# EAGLE board Soccer_Robot V4 (EAGLE 9.5.1)
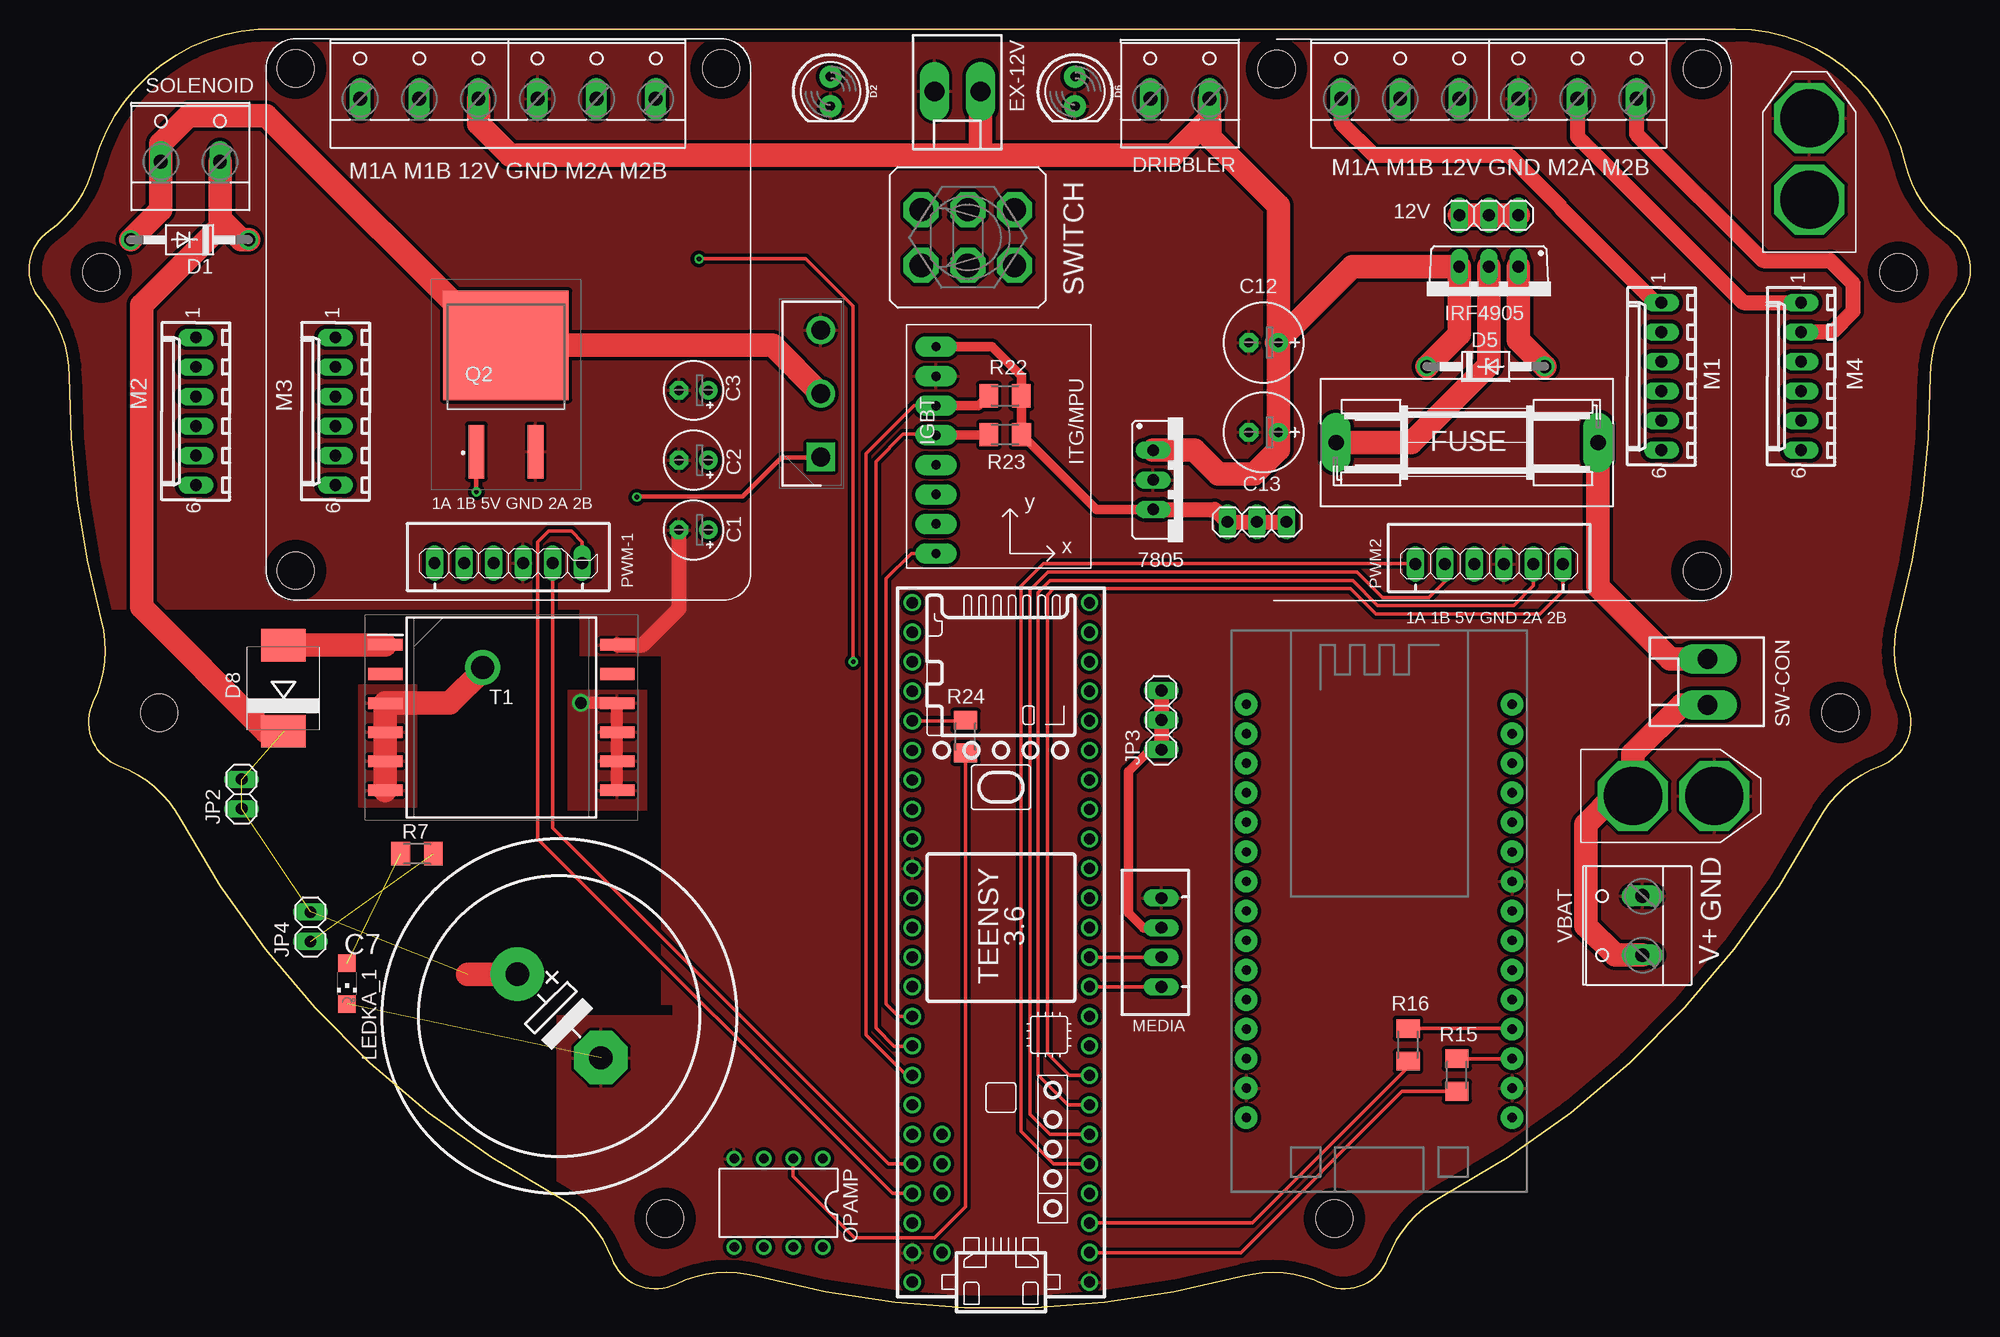
[diagram p0: board, top side]
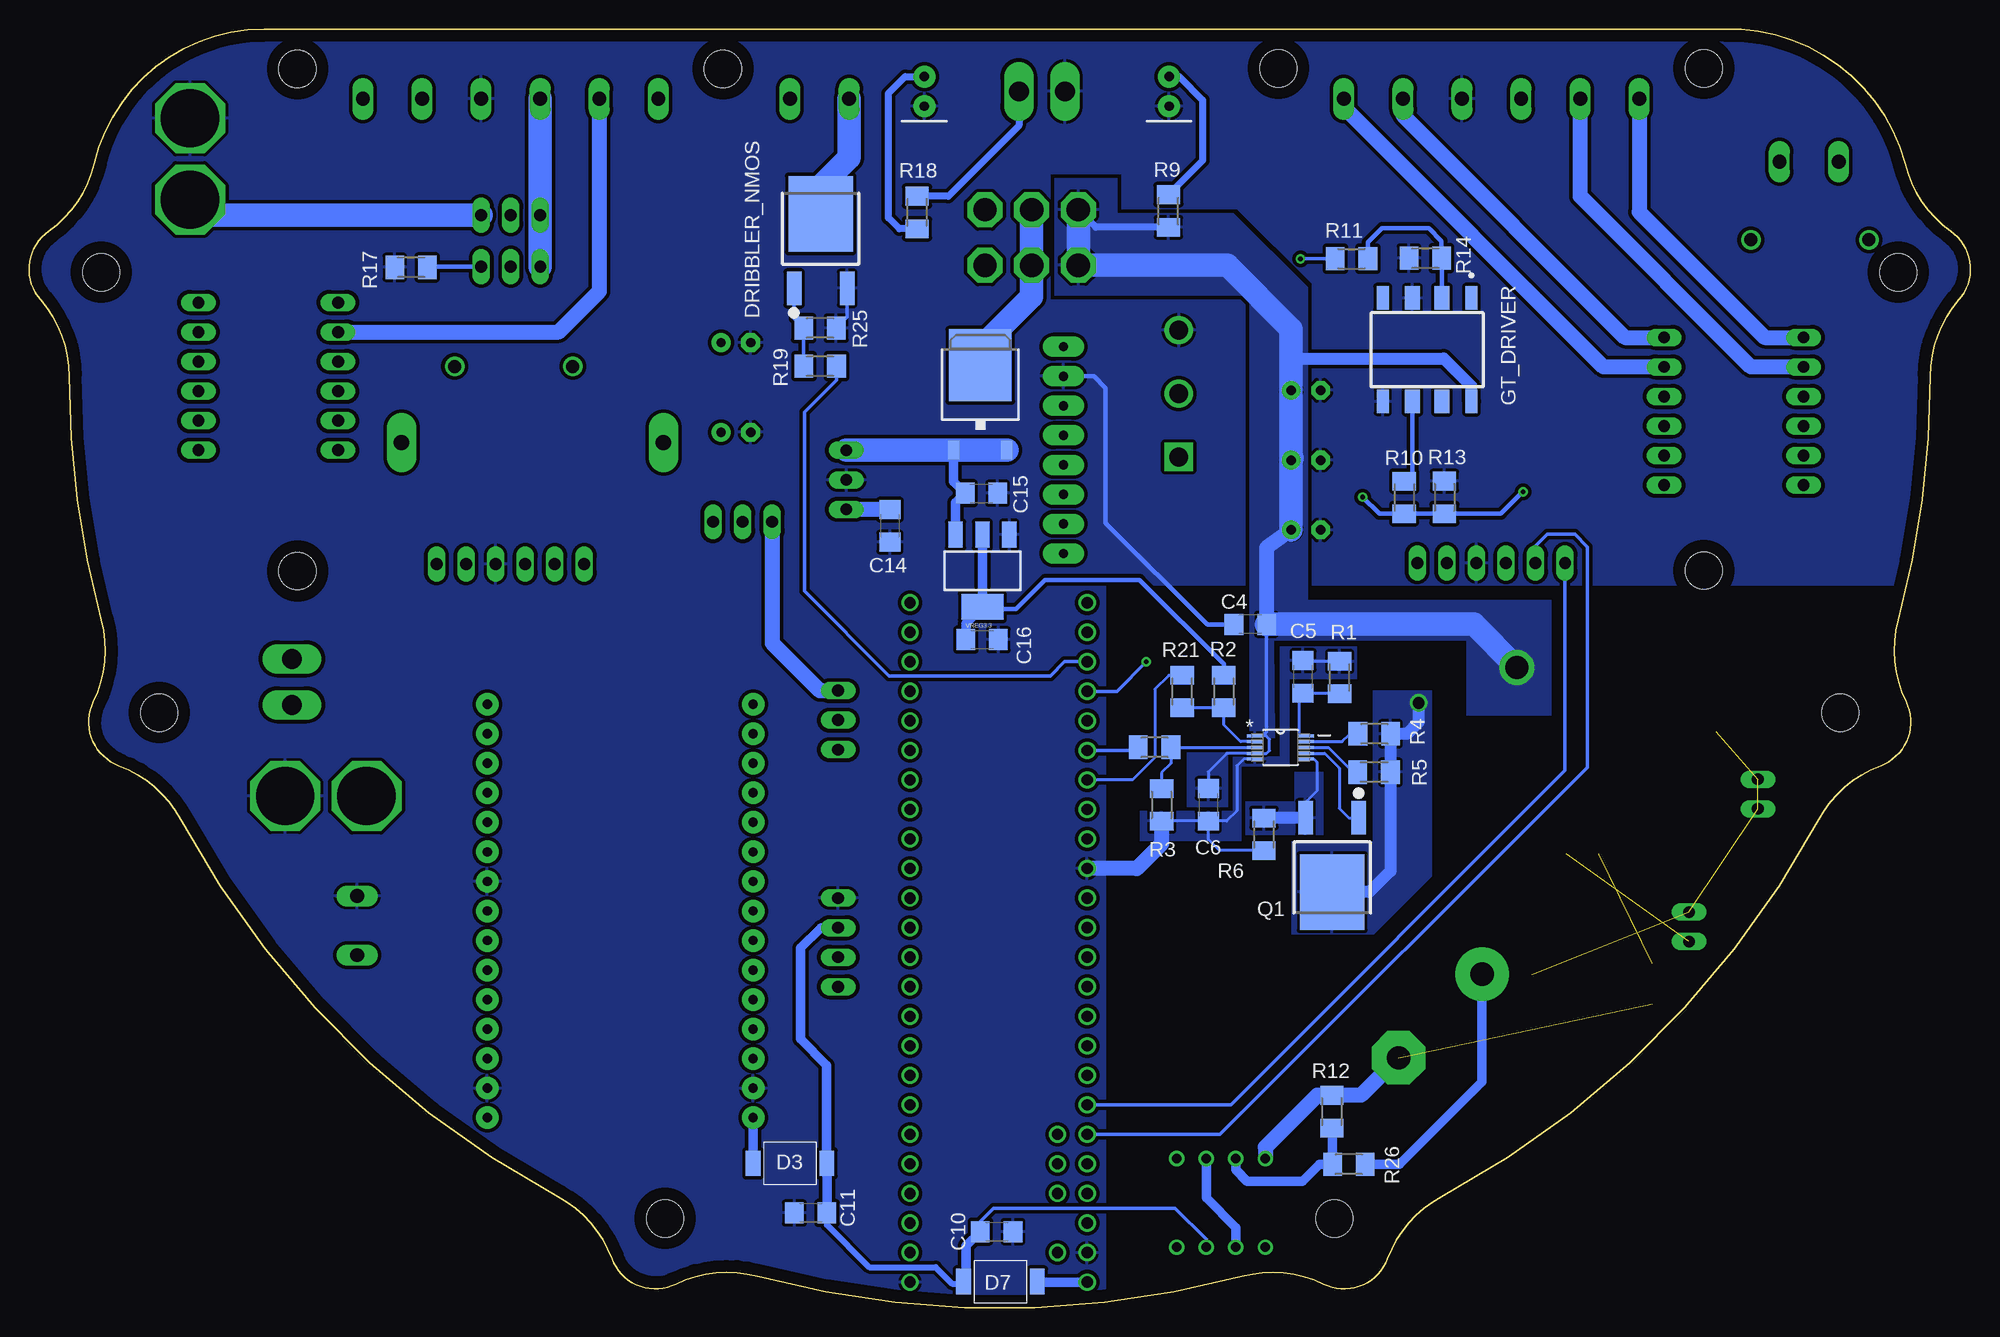
[diagram p1: board, bottom side, seen from below]

Size 166.9 x 109.94 mm. Coordinates in mm from the lower left corner, seen from the top.
Outline: 21.21,109.94 146.7,109.94 arc-77 161.29,98.39 arc41 165.22,92.55 arc-96 165.92,86.66 arc41 163.45,80.07 arc-15 160.69,59.12 arc41 161.37,52.11 arc-96 159.17,46.6 arc41 153.87,41.98 arc-33 121.41,9.53 arc41 116.79,4.22 arc-96 111.28,2.03 arc41 104.28,2.7 arc-30 62.62,2.7 arc41 55.62,2.03 arc-96 50.11,4.22 arc41 45.49,9.53 arc-33 13.03,41.98 arc41 7.73,46.6 arc-96 5.53,52.11 arc41 6.21,59.12 arc-15 3.45,80.07 arc41 0.98,86.66 arc-96 1.68,92.55 arc41 5.61,98.39 arc-77 21.21,109.94
Copper layers (1*16): Top 0.035mm / dielectric 1.5mm / Bottom 0.035mm
Design rules "default": minimum track width 6mil, minimum drill 0.35mm, track to track 6mil, track to pad 6mil, pad to pad 6mil, via to via 6mil, smd to smd 6mil, copper to edge 40mil, drill to drill 6mil, minimum pad ring 10mil, minimum via ring 8mil, stop-mask expansion 4mil, vias tented up to drill 0mil, thermal gap 10mil
Holes 3.2 mm at 143.82,106.52 107.25,106.52 22.92,106.57 54.68,7.68 11.19,51.17 22.92,63.39 6.21,89.03 112.22,7.68 143.82,63.34 155.71,51.17 160.69,89.03 59.49,106.57

## Footprints (pad centres in the part's own frame; a part is rotated, then mirrored left to right if it is on the bottom)
1X03 = drill 1.016 long: 1 -2.54,0; 2 0,0; 3 2.54,0
78XXS = drill 1.016 long: GND 0,-2.54; IN -2.54,-2.54; OUT 2.54,-2.54
E2,5-5 = drill 0.813 pad 1.6: + -1.27,0 | drill 0.813 pad 1.6 octagon: - 1.27,0
C1206 = smd 1.6 x 1.8: 1 -1.4,0; 2 1.4,0
EB30D = drill 2.007 pad 4.597: + -5.08,0 | drill 2.007 pad 4.597 octagon: - 5.08,0
E2,5-7 = drill 0.813 pad 1.6: + -1.27,0 | drill 0.813 pad 1.6 octagon: - 1.27,0
DO41-10 = drill 1.118: A 5.08,0; C -5.08,0
LED_5MM = drill 0.813 pad 1.88: A -1.27,0; K 1.27,0
SMBG = smd 1.27 x 2.16: A 3.17,0; C -3.17,0
DO41Z10 = drill 1.118: A 5.08,0; C -5.08,0
SMC = smd 2.8 x 3.8: A 3.7,0; C -3.7,0
W237-132 = drill 1.194 long: 1 -2.54,-0.635; 2 2.54,-0.635
DPAK3-CASE-369AS = smd 1.25 x 2.85: 1 -2.28,-6.4; 2 2.28,-6.4 | smd 5.55 x 6.5: 3 0,0
KK-156-2 = drill 1.7 pad 2.184 long: 1 -1.98,0; 2 1.98,0
SH22,5A = drill 1.321 pad 2.54 long: 1 -11.252,0; 2 11.252,0
HCPL-3120-GULL-WING = smd 1.016 x 2: 1 -3.81,-4.45; 4 3.81,-4.45; 5 3.81,4.45; 8 -3.81,4.45 | smd 1.27 x 2: 2 -1.27,-4.45; 3 1.27,-4.45; 6 1.27,4.45; 7 -1.27,4.45
TO252 = smd 1 x 1.6: 1 -2.28,-6.07; 2 2.28,-6.07 | smd 5.4 x 6.2: 3 0,1.23
TO545P500X1560X2420-3P = drill 1.62 pad 2.43 square: 1 0,0 | drill 1.62 pad 2.43: 2 5.45,0; 3 10.9,0
TO220BV = drill 1.016 long: D 0,-2.54; G -2.54,-2.54; S 2.54,-2.54
1X02 = drill 1.016 long: 1 -1.27,0; 2 1.27,0
CHIPLED_1206 = smd 1.5 x 1.5: A 0,-1.75; C 0,1.75
6410-06 = drill 1.016 long: 1 6.35,0; 2 3.81,0; 3 1.27,0; 4 -1.27,0; 5 -3.81,0; 6 -6.35,0
JST-XH-04-PACKAGE-LONG-PAD = drill 1.016 long: 1 -3.81,0; 2 -1.27,0; 3 1.27,0; 4 3.81,0
DIL08 = drill 0.813 pad 1.27: 1 -3.81,-3.81; 2 -1.27,-3.81; 3 1.27,-3.81; 4 3.81,-3.81; 5 3.81,3.81; 6 1.27,3.81; 7 -1.27,3.81; 8 -3.81,3.81
JST-XH-06-PACKAGE-LONG-PAD = drill 1.016 long: 1 -6.35,0; 2 -3.81,0; 3 -1.27,0; 4 1.27,0; 5 3.81,0; 6 6.35,0
IDB30E60 = smd 4.6 x 1.35: 1 6.315,-2.55; 3 6.315,2.55 | smd 9.4 x 10.8: 2 -2.835,0
M1206 = smd 1.6 x 2: 1 -1.4,0; 2 1.4,0
320-938 = drill 2.007 octagon: 1 -2.388,4.013; 2 -2.388,0; 3 -2.388,-4.013; 4 2.388,4.013; 5 2.388,0; 6 2.388,-4.013
SOP250P2197X889-12N = smd 2.95 x 1: 1 -9.975,6.25; 2 -9.975,3.75; 3 -9.975,1.25; 4 -9.975,-1.25; 5 -9.975,-3.75; 6 -9.975,-6.25; 7 9.975,-6.25; 8 9.975,-3.75; 9 9.975,-1.25; 10 9.975,1.25; 11 9.975,3.75; 12 9.975,6.25
SOP50P490X110-10N = smd 1.397 x 0.279: 1 -2.184,0.991; 2 -2.184,0.508; 3 -2.184,0; 4 -2.184,-0.508; 5 -2.184,-0.991; 6 2.184,-0.991; 7 2.184,-0.508; 8 2.184,0; 9 2.184,0.508; 10 2.184,0.991
GY-521 = drill 0.8 pad 1.778 long: ADO -8.89,-6.35; GND -8.89,6.35; INT -8.89,-8.89; SCL -8.89,3.81; SDA -8.89,1.27; VCC -8.89,8.89; XCL -8.89,-3.81; XDA -8.89,-1.27
XT60 = drill 5 octagon: + 4.5,0; - 11.5,0
ESP12E_DEVKIT = drill 0.8 pad 1.93: 3V3@0 -11.43,-7.62; 3V3@1 11.43,5.08; 3V3@2 11.43,-17.78; AD0 -11.43,17.78; CLK -11.43,-2.54; CMD -11.43,2.54; D0 11.43,17.78; D1 11.43,15.24; D2 11.43,12.7; D3 11.43,10.16; D4 11.43,7.62; D5 11.43,0; D6 11.43,-2.54; D7 11.43,-5.08; D8 11.43,-7.62; EN -11.43,-10.16; GND@0 -11.43,-5.08; GND@1 -11.43,-15.24; GND@2 11.43,2.54; GND@3 11.43,-15.24; RST -11.43,-12.7; RSV@0 -11.43,15.24; RSV@1 -11.43,12.7; RX 11.43,-10.16; SD0 -11.43,0; SD1 -11.43,5.08; SD2 -11.43,7.62; SD3 -11.43,10.16; TX 11.43,-12.7; VIN -11.43,-17.78
TEENSY_3.5/3.6_BASIC = drill 0.965: 0/RX -25.4,-7.62; 1/TX -22.86,-7.62; 2 -20.32,-7.62; 3/CANTX -17.78,-7.62; 3V3 7.62,-7.62; 3V3_LO -22.86,7.62; 4/CANRX -15.24,-7.62; 5 -12.7,-7.62; 6 -10.16,-7.62; 7 -7.62,-7.62; 8 -5.08,-7.62; 9/CS -2.54,-7.62; 10/CS 0,-7.62; 11/MOSI 2.54,-7.62; 12/MISO 5.08,-7.62; 13/SCK 5.08,7.62; 14/A0 2.54,7.62; 15/A1 0,7.62; 16/A2 -2.54,7.62; 17/A3 -5.08,7.62; 18/A4/SDA -7.62,7.62; 19/A5/SCL -10.16,7.62; 20/A6 -12.7,7.62; 21/A7 -15.24,7.62; 21/DAC0 12.7,7.62; 22/A8 -17.78,7.62; 23/A9 -20.32,7.62; 24 10.16,-7.62; 25 12.7,-7.62; 26 15.24,-7.62; 27 17.78,-7.62; 28 20.32,-7.62; 29 22.86,-7.62; 30 25.4,-7.62; 31/A12 27.94,-7.62; 32/A13 30.48,-7.62; 33/A14 30.48,7.62; 34/A15 27.94,7.62; 35/A16 25.4,7.62; 36/A17 22.86,7.62; 37/A18 20.32,7.62; 38/A19 17.78,7.62; 39/A20 15.24,7.62; A10 -17.78,5.08; A11 -15.24,5.08; A22/DAC1 10.16,7.62; AGND -25.4,7.62; AREF -20.32,5.08; GND -27.94,-7.62; GND2 7.62,7.62; VIN -27.94,7.62; VUSB -25.4,5.08
SOT223 = smd 1.219 x 2.235: 1 -2.311,-3.099; 2 0,-3.099; 3 2.311,-3.099 | smd 3.6 x 2.2: 4 0,3.099
W237-6P = drill 1.194 long: 1 -12.7,-0.635; 2 -7.62,-0.635; 3 -2.54,-0.635; 4 2.54,-0.635; 5 7.62,-0.635; 6 12.7,-0.635

## Placement (x,y rotation side)
12V  [1X03]  125.49,93.94 0 top
7805  [78XXS]  99.18,71.18 270 top
C1  56uF  [E2,5-5]  57.14,66.88 180 top
C2  56uF  [E2,5-5]  57.14,72.88 180 top
C3  56uF  [E2,5-5]  57.14,78.88 180 top
C4  10uF  [C1206]  61.91,58.75 180 bottom
C5  100pF  [C1206]  57.37,54.25 90 bottom
C6  10uF  [C1206]  65.52,43.25 270 bottom
C7  [EB30D]  45.58,25.08 315 top
C10  10uF  [C1206]  83.72,6.55 0 bottom
C11  10uF  [C1206]  99.71,8.15 180 bottom
C12  [E2,5-7]  106.14,82.98 180 top
C13  47uF  [E2,5-7]  106.14,75.28 180 top
C14  10uF  [C1206]  92.9,67.23 270 bottom
C15  10uF  [C1206]  85.03,70.03 0 bottom
C16  10uF  [C1206]  84.97,57.45 0 bottom
D1  1N4004  [DO41-10]  13.8,91.82 180 top
D2  IN_LED  [LED_5MM]  68.9,104.58 270 top
D3  [SMBG]  101.49,12.41 0 bottom
D5  [DO41Z10]  125.23,80.93 0 top
D6  [LED_5MM]  89.93,104.58 270 top
D7  [SMBG]  83.39,2.25 180 bottom
D8  [SMC]  21.87,53.25 90 top
DRIBBLER  [W237-132]  98.94,104.58 0 top
DRIBBLER_NMOS  FDD86369-F085  [DPAK3-CASE-369AS]  98.85,94.05 0 bottom
EX-12V  [KK-156-2]  79.82,104.58 180 top
FUSE  [SH22,5A]  123.62,74.39 180 top
GT_DRIVER  HCPL-3120-300E  [HCPL-3120-GULL-WING]  46.71,82.37 180 bottom
IC2  DIODE  [TO252]  85.12,79.81 0 bottom
IGBT  FGA25N120ANTDTU  [TO545P500X1560X2420-3P]  68.06,73.15 90 top
IRF4905  IRF9530  [TO220BV]  125.49,86.97 180 top
JP1  +5V  [1X03]  105.56,67.57 0 top
JP2  [1X02]  18.27,44.17 90 top
JP3  +5V  [1X03]  97.34,50.53 90 top
JP4  [1X02]  24.19,32.75 90 top
LEDKA_1  [CHIPLED_1206]  27.33,27.87 180 top
M1  22-27-2061-06  [6410-06]  140.34,80.08 90 top
M2  22-27-2061-06  [6410-06]  14.34,77.08 90 top
M3  22-27-2061-06  [6410-06]  26.34,77.08 90 top
M4  22-27-2061-06  [6410-06]  152.34,80.08 90 top
MEDIA  [JST-XH-04-PACKAGE-LONG-PAD]  97.34,31.41 90 top
OPAMP  MCP601P  [DIL08]  64.42,9.01 180 top
PWM2  JST-XH-06-PIN-LONG-PAD  [JST-XH-06-PACKAGE-LONG-PAD]  125.52,63.95 0 top
PWM-1  JST-XH-06-PIN-LONG-PAD  [JST-XH-06-PACKAGE-LONG-PAD]  41.2,64.03 0 top
Q1  FDD86369-F085  [DPAK3-CASE-369AS]  54.87,35.73 180 bottom
Q2  IGB20N60H3  [IDB30E60]  41,79.91 270 top
R1  2.49K  [M1206]  54.23,54.18 270 bottom
R2  10K  [M1206]  64.19,52.98 90 bottom
R3  10K  [M1206]  69.53,43.24 90 bottom
R4  60.4K  [M1206]  51.26,49.35 0 bottom
R5  43K  [M1206]  51.26,46.05 0 bottom
R6  8m  [M1206]  60.75,40.7 90 bottom
R7  47K  [M1206]  33.35,39.03 0 top
R9  1K  [M1206]  68.96,94.3 270 bottom
R10  100E  [M1206]  48.68,69.67 90 bottom
R11  100E  [M1206]  53.2,90.19 180 bottom
R12  1.5k  [M1206]  54.88,16.86 270 bottom
R13  10k  [M1206]  45.22,69.68 90 bottom
R14  10k  [M1206]  46.87,90.25 180 bottom
R15  100E  [M1206]  122.75,20.01 270 top
R16  100E  [M1206]  118.55,22.6 270 top
R17  100K  [M1206]  134.07,89.45 0 bottom
R18  1K  [M1206]  90.57,94.17 90 bottom
R19  100E  [M1206]  98.89,80.96 0 bottom
R20  100E  [M1206]  70.13,48.19 0 bottom
R21  100E  [M1206]  67.76,52.98 270 bottom
R22  4.7K  [M1206]  83.9,78.41 180 top
R23  4.7k  [M1206]  83.92,75.08 180 top
R24  100E  [M1206]  80.5,49.11 270 top
R25  10K  [M1206]  98.9,84.23 0 bottom
R26  100k  [M1206]  53.44,12.34 0 bottom
SOLENOID  [W237-132]  13.87,99.18 0 top
SW-CON  [KK-156-2]  144.31,53.81 90 top
SWITCH  [320-938]  80.71,92.02 270 top
T1  DA2032-ALD  [SOP250P2197X889-12N]  40.6,50.74 0 top
U1  LT3750EMSPBF  [SOP50P490X110-10N]  59.31,48.17 0 bottom
U2  GY-521MPU6050  [GY-521]  86.86,73.74 0 top
U$1  XT60  [XT60]  153.06,90.78 90 top
U$2  ESP12E_DEVKIT  [ESP12E_DEVKIT]  116.08,34.12 0 top
U$3  TEENSY_3.5/3.6_BASIC  [TEENSY_3.5/3.6_BASIC]  83.56,30.14 90 top
VBAT  [W237-132]  138.07,32.86 90 top
VBAT2  XT60  [XT60]  133.4,44 0 top
VREG3.3  V_REG_LD1117VXXLD1117-SMD  [SOT223]  84.94,63.37 180 bottom
X1  [W237-6P]  41.17,104.58 0 top
X2  [W237-6P]  125.5,104.58 0 top

## Library data of the parts
12V JP1-JP4 = pinhead
7805 = v-reg
C1-C7 C10-C16 = rcl; SPICEPREFIX: C
D1 D3 D5 D7 D8 = diode
D2 D6 = SparkFun-LED
DRIBBLER SOLENOID VBAT X1 X2 = con-wago-508; OC_FARNELL: unknown; OC_NEWARK: unknown
DRIBBLER_NMOS Q1 = FDD86369-F085; DESCRIPTION: MOSFET 80V 90A Dual DPAK N-Chnl PowerTrench; HEIGHT: mm; MANUFACTURER_NAME: ON Semiconductor; MANUFACTURER_PART_NUMBER: FDD86369-F085; MOUSER_PART_NUMBER: 512-FDD86369_F085; MOUSER_PRICE-STOCK: https://www.mouser.com/Search/Refine.aspx?Keyword=512-FDD86369_F085
EX-12V M1-M4 SW-CON = con-molex; MF: MOLEX; OC_FARNELL: unknown; OC_NEWARK: unknown
FUSE = fuse; MPN: 0031.7701.11; OC_FARNELL: unknown; OC_NEWARK: 04F1224
GT_DRIVER = HCPL-3120-300E; DESCRIPTION: Logic Output Optocouplers 2.0A IGBT Gate Drive; HEIGHT: mm; MANUFACTURER_NAME: Avago Technologies; MANUFACTURER_PART_NUMBER: HCPL-3120-300E; MOUSER_PART_NUMBER: 630-HCPL-3120-300E; MOUSER_PRICE-STOCK: https://www.mouser.com/Search/Refine.aspx?Keyword=630-HCPL-3120-300E
IC2 = v-reg-2
IGBT = FGA25N120ANTDTU; DESCRIPTION: IGBT N-Ch 1200V 50A NPT Trench TO3PN Fairchild FGA25N120ANTDTU, 50 A 1200 V, 1MHz, 3-Pin TO-3P; HEIGHT: 5mm; MANUFACTURER_NAME: ON Semiconductor; MANUFACTURER_PART_NUMBER: FGA25N120ANTDTU; MOUSER_PART_NUMBER: 512-FGA25N120ANTDTU; MOUSER_PRICE-STOCK: https://www.mouser.com/Search/Refine.aspx?Keyword=512-FGA25N120ANTDTU
IRF4905 = transistor-power
LEDKA_1 = hacesoft
MEDIA PWM2 PWM-1 = Rembrandt Electronics - JST XH Connectors v1-0
OPAMP = linear
Q2 = IGB20N60H3; DESCRIPTION: IGBT Transistors 600v Hi-Speed SW IGBT; HEIGHT: 4mm; MANUFACTURER_NAME: Infineon; MANUFACTURER_PART_NUMBER: IGB20N60H3; MOUSER_PART_NUMBER: 726-IGB20N60H3; MOUSER_PRICE-STOCK: https://www.mouser.com/Search/Refine.aspx?Keyword=726-IGB20N60H3
R1-R7 R9-R26 = rcl; SPICEPREFIX: R
SWITCH = switch
T1 = DA2032ALD; DESCRIPTION: COILCRAFT - DA2032-ALD - TRANSFORMER, FLYBACK, LT3750, SMD; HEIGHT: 8.89mm; MANUFACTURER_NAME: COILCRAFT; MANUFACTURER_PART_NUMBER: DA2032-ALD; MOUSER_PART_NUMBER: 994-DA2032-ALD; MOUSER_PRICE-STOCK: https://www.mouser.com/Search/Refine.aspx?Keyword=994-DA2032-ALD
U1 = LT3750-element14; MPN: LT3750EMS#PBF; OC_FARNELL: 1273500; OC_NEWARK: 57M8591; PACKAGE: MSOP-10; SUPPLIER: Linear Technology
U2 = gy-521
U$1 VBAT2 = XT60
U$2 = ESP12E_DEVKIT
U$3 = Teensy356
VREG3.3 = SparkFun-IC-Power; PROD_ID: VREG-13917

## Nets
1A: PWM2.1 U$3.3/CANTX
1B: PWM2.2 U$3.4/CANRX
2A: PWM-1.1 U$3.20/A6
2B: PWM-1.2 U$3.21/A7
3A: PWM-1.5 U$3.22/A8
3B: PWM-1.6 U$3.23/A9
4A: PWM2.5 U$3.5
4B: PWM2.6 U$3.6
+3V3: C16.1 R2.2 VREG3.3.2 VREG3.3.4
+5V: 7805.OUT C10.1 C11.1 C14.1 D3.A D7.A JP1.1 JP1.2 JP1.3 JP3.1 JP3.2 JP3.3 MEDIA.3 OPAMP.7 R22.1 R23.1 U2.VCC
+12V: 12V.1 12V.2 12V.3 7805.IN C12.+ C13.+ C15.1 D5.C DRIBBLER.2 EX-12V.1 IC2.1 IC2.2 IRF4905.S R18.2 U$1.+ VREG3.3.3 X1.3 X2.3
CAP+: C7.+ D1.C D8.C JP2.1 JP2.2 JP4.2 R26.2 SOLENOID.2
CAP_ADC: OPAMP.2 OPAMP.6 R24.2
CAP_RAW: OPAMP.3 R12.2 R26.1
CHARGE: R3.2 R20.2 U1.3
DONE: R2.1 R21.2 U1.2
DRAIN: DRIBBLER.1 DRIBBLER_NMOS.3
DRIBBLER: R19.2 U$3.35/A16
ESP_RX: R16.1 U$2.RX
ESP_TX: R15.1 U$2.TX
GATE: Q1.1 U1.7
GND: 7805.GND C1.- C2.- C3.- C4.2 C5.2 C6.2 C7.- C10.2 C11.2 C12.- C13.- C14.2 C15.2 C16.2 D2.K D6.K DRIBBLER_NMOS.2 EX-12V.2 GT_DRIVER.3 GT_DRIVER.5 IGBT.3 LEDKA_1.C MEDIA.4 OPAMP.4 PWM2.4 PWM-1.4 Q2.3 R1.1 R3.1 R6.1 R12.1 R13.2 R14.2 R17.1 R25.2 T1.12 U1.5 U2.GND U$1.- U$2.GND@1 U$2.GND@2 U$2.GND@3 U$3.AGND U$3.GND U$3.GND2 VBAT2.- VBAT.2 VREG3.3.1 X1.4 X2.4
INT: U2.INT U$3.17/A3
MD-RX: MEDIA.2 U$3.10/CS
MD-TX: MEDIA.1 U$3.9/CS
N$2: LEDKA_1.A R7.1
N$3: JP4.1 R7.2
N$4: D8.A T1.1
N$7: D2.A R9.1
N$8: IGBT.1 Q2.1 R10.1 R13.1
N$9: GT_DRIVER.6 R10.2
N$10: D1.A IGBT.2 Q2.2 SOLENOID.1
N$11: GT_DRIVER.2 R11.1 R14.1
N$13: M3.1 X1.5
N$15: M3.2 X1.6
N$16: M2.2 X1.2
N$17: M2.1 X1.1
N$19: R15.2 U$3.0/RX
N$20: R16.2 U$3.1/TX
N$24: FUSE.2 IRF4905.D
N$25: D5.A IRF4905.G R17.2
N$26: D6.A R18.1
N$27: DRIBBLER_NMOS.1 R19.1 R25.1
N$29: M4.1 X2.5
N$30: M4.2 X2.6
N$31: M1.1 X2.1
N$33: R20.1 U$3.38/A19
N$34: R21.1 U$3.39/A20
N$35: R24.1 U$3.37/A18
N$36: D3.C U$2.VIN
N$70: M1.2 X2.2
N$72: FUSE.1 SW-CON.2
N$75: D7.C U$3.VIN
RDCM: R5.1 U1.8
RGB: C5.1 R1.2 U1.10
RVOUT: R4.1 U1.9
SCL: R22.2 U2.SCL U$3.19/A5/SCL
SDA: R23.2 U2.SDA U$3.18/A4/SDA
SINK: Q1.3 R4.2 R5.2 T1.7 T1.8 T1.9 T1.10
SOL_TRIG: R11.2 U$3.36/A17
SOURCE: Q1.2 R6.2 U1.6
VBAT+: SW-CON.1 VBAT2.+ VBAT.1
VIN: IC2.3 SWITCH.2 SWITCH.5
VTRANS: C1.+ C2.+ C3.+ C4.1 C6.1 GT_DRIVER.8 R9.2 SWITCH.3 SWITCH.6 T1.3 T1.4 T1.5 T1.6 U1.1 U1.4

## Tracks (layer width: path | path; a pad name or v marks a point on that pad's centre or on a via)
1A
  Top 0.305: PWM2.1 119.14,63.98 87.19,63.98 85.27,62.06 85.27,15.15 88.06,12.36 U$3.3/CANTX
1B
  Top 0.305: U$3.4/CANRX 87.76,14.9 86.04,16.62 86.04,61.71 87.59,63.26 114.16,63.26 116.34,61.08 120.34,61.08 121.71,62.46 PWM2.2
2A
  Bottom 0.305: PWM-1.1 34.85,46.19 63.58,17.47 75.91,17.47 U$3.20/A6
2B
  Bottom 0.305: PWM-1.2 37.39,65.48 36.36,66.51 34.03,66.51 32.94,65.43 32.94,46.47 64.5,14.9 U$3.21/A7
3A
  Top 0.305: PWM-1.5 45.01,41.25 73.9,12.36 U$3.22/A8
3B
  Top 0.305: PWM-1.6 47.55,65.84 46.63,66.76 44.66,66.76 43.74,65.84 43.74,40.31 74.22,9.82 U$3.23/A9
4A
  Top 0.305: PWM2.5 129.33,62.09 129.34,62.08 127.65,60.39 115.92,60.39 113.8,62.51 87.76,62.51 86.74,61.48 86.74,20.01 89.31,17.44 U$3.5
4B
  Top 0.305: PWM2.6 131.87,61.62 129.89,59.63 115.79,59.63 113.59,61.84 88.09,61.84 87.54,61.28 87.54,21.88 89.44,19.98 U$3.6
+3V3
  Bottom 0.406: VREG3.3.4 84.75,60.08 82.06,60.08 79.55,62.58 71.43,62.58 64.19,55.34 R2.2
  Bottom 0.813: VREG3.3.2 VREG3.3.4 86.37,58.85 C16.1
+5V
  Top 0.813: U2.VCC 82.79,82.63 85.3,80.12 R22.1 85.32,78.4 R23.1 91.75,68.64 7805.OUT | MEDIA.3 95.8,32.68 94.52,33.96 94.52,46.09 96.42,47.99 JP3.1
  Top 1.27: JP1.3 JP1.2 JP1.1 101.95,68.64 7805.OUT | JP3.3 JP3.2 JP3.1
  Bottom 0.305: OPAMP.7 65.69,5.87 68.39,8.57 83.99,8.57 85.12,7.44 C10.1
  Bottom 0.508: C11.1 98.31,7.12 94.68,3.49 88.97,3.49 87.56,2.08 86.73,2.08 D7.A
  Bottom 0.813: MEDIA.3 98.83,32.68 100.57,30.93 100.57,23.11 98.32,20.86 D3.A C11.1 | C10.1 86.34,5.32 86.34,2.47 D7.A
  Bottom 1.27: C14.1 7805.OUT | JP1.1 103.02,57.15 98.94,53.07 JP3.3
+12V
  Top 2: D5.C 122.95,83.73 IRF4905.S 113.77,89.51 107.26,83 C12.+ | 12V.1 12V.2 12V.3 | C12.+ C13.+ 107.41,73.77 105.3,71.66 102.26,71.66 100.2,73.72 7805.IN | C12.+ 107.41,94.76 101.52,100.65 DRIBBLER.2 101.48,102.22 98.34,99.08 81.8,99.08 | X1.3 38.63,101.79 41.34,99.08 81.8,99.08 | EX-12V.1 81.8,99.08
  Bottom 0.61: EX-12V.1 81.8,101.63 87.86,95.57 R18.2
  Bottom 0.813: VREG3.3.3 87.25,69.21 C15.1 87.42,71.02 87.42,73.72
  Bottom 2: X2.3 12V.1 IRF4905.S | 12V.3 151.2,93.94 152.54,95.28 U$1.+ | IC2.2 IC2.1 87.42,73.72 7805.IN
CAP+  (4 unrouted)
  Top 2: C7.+ 37.68,28.68 | SOLENOID.2 16.41,93.64 | D1.C 18.23,91.82 16.41,93.64 | 16.41,93.64 16.41,92.95 9.69,86.23 9.69,60.23 20.36,49.55 D8.C
  Bottom 0.813: C7.+ 41.98,19.44 49.08,12.34 R26.2
CAP_ADC
  Top 0.305: R24.2 80.5,8.69 77.84,6.04 70.96,6.04 65.69,11.3 OPAMP.2
  Bottom 0.813: OPAMP.2 65.69,9.43 63.15,6.89 OPAMP.6
CAP_RAW
  Bottom 0.813: R12.2 54.84,15.42 R26.1 55.98,12.34 57.43,10.88 62.19,10.88 63.15,11.84 OPAMP.3
CHARGE
  Bottom 0.254: U1.3 R20.2 68.73,46.8 69.53,46.01 R3.2
DONE
  Bottom 0.254: R21.2 R2.1 64.19,50.12 62.75,48.68 U1.2
DRAIN
  Bottom 2: DRIBBLER_NMOS.3 98.85,96.42 96.4,98.87 DRIBBLER.1
DRIBBLER
  Bottom 0.305: U$3.35/A16 77.88,55.54 79.11,54.31 92.96,54.31 100.25,61.6 100.25,77.02 97.49,79.78 R19.2
ESP_RX
  Top 0.305: R16.1 127.47,24 U$2.RX
ESP_TX
  Top 0.305: R15.1 U$2.TX
GATE
  Bottom 0.254: U1.7 55.51,47.67 54.25,46.41 54.25,42.93 53.45,42.13 Q1.1
GND  (1 unrouted)
  Top 1.27: T1.12 52.76,56.99 55.87,60.1 C1.-
  Bottom 0.254: U1.5 62.47,47.18 63.07,46.59 63.07,42.73 63.94,41.85 C6.2 | C6.2 R3.1 | R6.1 64.56,39.3 65.52,40.26 C6.2 | R1.1 57.31,55.58 C5.2
  Bottom 0.305: R25.2 96.57,85.17 DRIBBLER_NMOS.2
  Bottom 0.406: C4.2 65.61,58.75 74.34,67.48 74.34,79.08 75.35,80.09 U2.GND
  Bottom 1.27: R3.1 69.53,39.89 71.66,37.76 U$3.GND2 | C7.- 52.4,18.26 R12.1 56.16,18.26 60.61,13.81 OPAMP.4
  pour Bottom (rank 4): 52.8,54.08 58.58,54.08 58.58,46.56 62.71,46.56 62.71,40.12 71.36,40.12 71.36,42.7 63.35,42.7 63.35,47.39 59.33,47.39 59.33,56.84 52.8,56.84
  pour Bottom (isolate 0.305, rank 5): 1.34,62.08 74.34,62.08 74.34,36.08 74.34,-3.92 170.34,-3.92 170.34,111.08 -0.66,111.08 -0.66,62.08
  pour Top (isolate 0.305, rank 5): -1.66,60.08 47.34,60.08 47.34,56.08 54.34,56.08 54.34,30.08 54.34,26.08 55.34,26.08 55.34,25.08 46.34,25.08 45.34,25.08 45.34,0.08 45.34,-7.92 176.34,-7.92 176.34,117.08 -3.66,117.08 -3.66,60.08
INT
  Top 0.305: U2.INT 75.85,64.85 73.68,62.69 73.68,26.13 74.75,25.06 U$3.17/A3
MD-RX
  Top 0.305: U$3.10/CS 97.31,30.14 MEDIA.2
MD-TX
  Top 0.305: U$3.9/CS MEDIA.1
N$2  (1 unrouted)
N$3  (1 unrouted)
N$4
  Top 2: T1.1 21.91,56.99 D8.A
N$7
  Bottom 0.61: R9.1 66.01,98.65 66.01,103.85 68.01,105.85 D2.A
N$8  (via drill 0.4)
  Top 0.406: Q2.1 v38.45,70.18 v38.46,70.17 | IGBT.1 67.99,73.08 64.68,73.08 61.33,69.73 52.28,69.73 v52.25,69.7
  Bottom 0.406: v38.46,70.17 v38.47,70.17 40.36,68.28 R13.1 45.23,68.27 R10.1 50.82,68.27 v52.25,69.7
N$9
  Bottom 0.406: GT_DRIVER.6 47.98,71.77 R10.2
N$10
  Top 2: D1.A 11.33,94.43 SOLENOID.1 11.33,100.09 13.72,102.48 20.4,102.48 40.13,82.75 Q2.2 63.92,82.75 IGBT.2
N$11
  Bottom 0.406: GT_DRIVER.2 45.44,90.22 R14.1 45.47,91.71 46.58,92.83 50.6,92.83 51.8,91.62 R11.1
N$13
  Bottom 1.27: X1.5 48.79,102.53 29.69,83.43 M3.1
N$15
  Bottom 1.27: M3.2 31.56,80.89 53.87,103.2 X1.6
N$16
  Bottom 1.27: M2.2 18.88,80.89 33.55,95.56 X1.2
N$17
  Bottom 1.27: X1.1 28.47,94.21 17.69,83.43 M2.1
N$19
  Top 0.305: U$3.0/RX 104.17,4.74 118.04,18.61 R15.2
N$20
  Top 0.305: U$3.1/TX 105.16,7.28 118.55,20.67 R16.2
N$24
  Top 2: FUSE.2 118.83,74.39 125.49,81.05 IRF4905.D
N$25
  Top 2: IRF4905.G 128.03,83.21 D5.A
  Bottom 0.406: IRF4905.G 132.61,89.51 R17.2
N$26
  Bottom 0.61: R18.1 92.08,92.77 93.02,93.71 93.02,104.41 91.58,105.85 D6.A
N$27
  Bottom 0.305: DRIBBLER_NMOS.1 101.13,85.06 R25.1 100.3,80.98 R19.1
N$29
  Top 1.27: X2.5 133.12,100.68 147.36,86.43 M4.1
N$30
  Top 1.27: X2.6 138.2,100.92 149.09,90.03 154.86,90.03 156.8,88.09 156.8,85.68 155.01,83.89 M4.2
N$31
  Top 1.27: X2.1 112.8,101.9 115.61,99.08 127.21,99.08 131.67,94.62 131.67,94.56 139.79,86.43 M1.1
N$33
  Bottom 0.305: R20.1 71.8,47.92 U$3.38/A19
N$34
  Bottom 0.254: R21.1 68.92,54.38 70.12,53.18 70.12,47.3 72.03,45.38 U$3.39/A20
N$35
  Top 0.305: U$3.37/A18 80.46,50.46 R24.1
N$36
  Bottom 0.813: D3.C 104.66,16.33 U$2.VIN
N$70
  Bottom 1.27: M1.2 121.37,83.89 117.88,87.38 X2.2
N$72
  Top 2: SW-CON.2 141.1,55.79 134.88,62.02 FUSE.1
N$75
  Bottom 0.813: D7.C 80.18,2.2 U$3.VIN
RDCM
  Bottom 0.254: U1.8 55.19,48.17 53.07,46.05 R5.1
RGB
  Bottom 0.254: R1.2 54.3,52.85 C5.1 57.68,52.54 57.68,49.16 U1.10
RVOUT
  Bottom 0.254: U1.9 54.02,48.68 53.35,49.35 R4.1
SCL
  Top 0.305: U2.SCL 76.07,77.55 71.95,73.44 71.95,23.48 75.45,19.98 U$3.19/A5/SCL
  Top 0.813: U2.SCL 81.64,77.55 R22.2
SDA
  Top 0.305: U$3.18/A4/SDA 75.9,22.49 74.38,22.49 72.8,24.07 72.8,72.77 75.13,75.1 77.88,75.1 U2.SDA
  Top 0.813: U2.SDA 82.45,75.01 R23.2
SINK  (via drill 1)
  Top 1.016: T1.7 T1.8 T1.9 T1.10 47.5,51.99 47.48,51.97 v47.44,52
  Bottom 1.016: R4.2 R5.2 49.86,37.56 51.69,35.73 Q1.3 | 49.86,48.97 R4.2 | v47.44,52 47.44,50.35 48.44,49.35 R4.2
  pour Top: 52.33,53.09 52.34,53.08 53.06,53.08 53.06,42.79 46.38,42.79 46.38,53.09
  pour Bottom (isolate 0.254): 46.34,53.08 46.34,37.08 51.34,32.08 58.34,32.08 58.34,39.08 58.34,40.08 51.34,40.08 51.34,53.08
SOL_TRIG  (via drill 0.4)
  Top 0.305: v57.6,90.19 66.76,90.19 70.84,86.1 v70.84,55.56 v70.85,55.55
  Bottom 0.305: R11.2 57.59,90.19 v57.6,90.19 | v70.85,55.55 73.39,53 U$3.36/A17
SOURCE
  Bottom 0.254: U1.6 56.45,47.18 56.19,46.92 56.19,44.42 57.34,43.27 57.34,42.32 Q1.2
  Bottom 1.016: Q1.2 60.72,42.13 R6.2
  pour Bottom (isolate 0.254): 58.12,46.03 58.12,43.48 62.34,43.48 62.34,40.68 55.62,40.68 55.62,46.03
VBAT+
  Top 2: VBAT.1 136.36,30.32 133.83,32.85 133.83,41.57 136.3,44.04 137.85,44.04 VBAT2.+ 137.9,47.64 142.09,51.83 SW-CON.1
VIN
  Bottom 2: SWITCH.2 SWITCH.5 80.71,86.95 85.12,82.54 IC2.3
VTRANS  (via drill 2)
  Top 2: T1.6 T1.5 T1.4 T1.3 36.17,51.99 39.11,54.93 v38.98,55.05
  Bottom 0.254: 65.48,44.95 C6.1 65.52,46.08 63.93,47.67 U1.4 60.51,47.67 60.26,47.91 60.26,48.87 60.56,49.16 60.85,49.16
  Bottom 0.305: U1.1 60.85,49.16 60.51,49.5 C4.1
  Bottom 0.61: R9.2 75.18,92.9 SWITCH.3
  Bottom 1.016: GT_DRIVER.8 42.9,79.23 45.28,81.61 58.41,81.61 C3.+
  Bottom 1.27: C1.+ 60.51,65.36 C4.1
  Bottom 2: v38.98,55.05 42.7,58.77 60.5,58.77 C4.1 | SWITCH.6 SWITCH.3 | 58.41,73.15 C3.+ 58.41,84.15 63.89,89.64 SWITCH.6 | 58.41,73.15 58.34,73.08 58.34,72.95 C2.+ | C1.+ 58.41,73.15 | 76.65,89.68 SWITCH.6
  pour Top: 28.34,53.08 28.34,43.08 32.34,43.08 33.34,43.08 33.34,53.08 33.34,53.5 28.77,53.5 28.34,53.5
  pour Bottom (isolate 0.254): 63.34,94.08 73.34,94.08 73.34,97.08 78.76,97.08 78.76,87.08 61.97,87.08 61.97,49.05 59.8,49.02 59.87,57.42 43.34,57.42 43.34,50.97 36.01,50.97 36.01,60.79 56.97,60.79 56.97,87.72
  pour Bottom (isolate 0.254): 63.84,43.08 63.84,47.42 63.84,47.91 67.34,47.91 67.34,43.08

## Text on the board
tNames: M1A M1B 12V GND M2A M2B | M1A M1B 12V GND M2A M2B | 1A 1B 5V GND 2A 2B | 1A 1B 5V GND 2A 2B | GND | V+